# Altium PCB leds.PcbDoc
Units mm, origin at the board's own origin, x right, y up, seen from the top; angles counter-clockwise.
Board outline 36 x 36 mm, 2 copper layers (Top Layer, Bottom Layer); 21 components, 11 nets, 44 pads, 2 vias.
Unrouted connection lines stored in the file: 1.
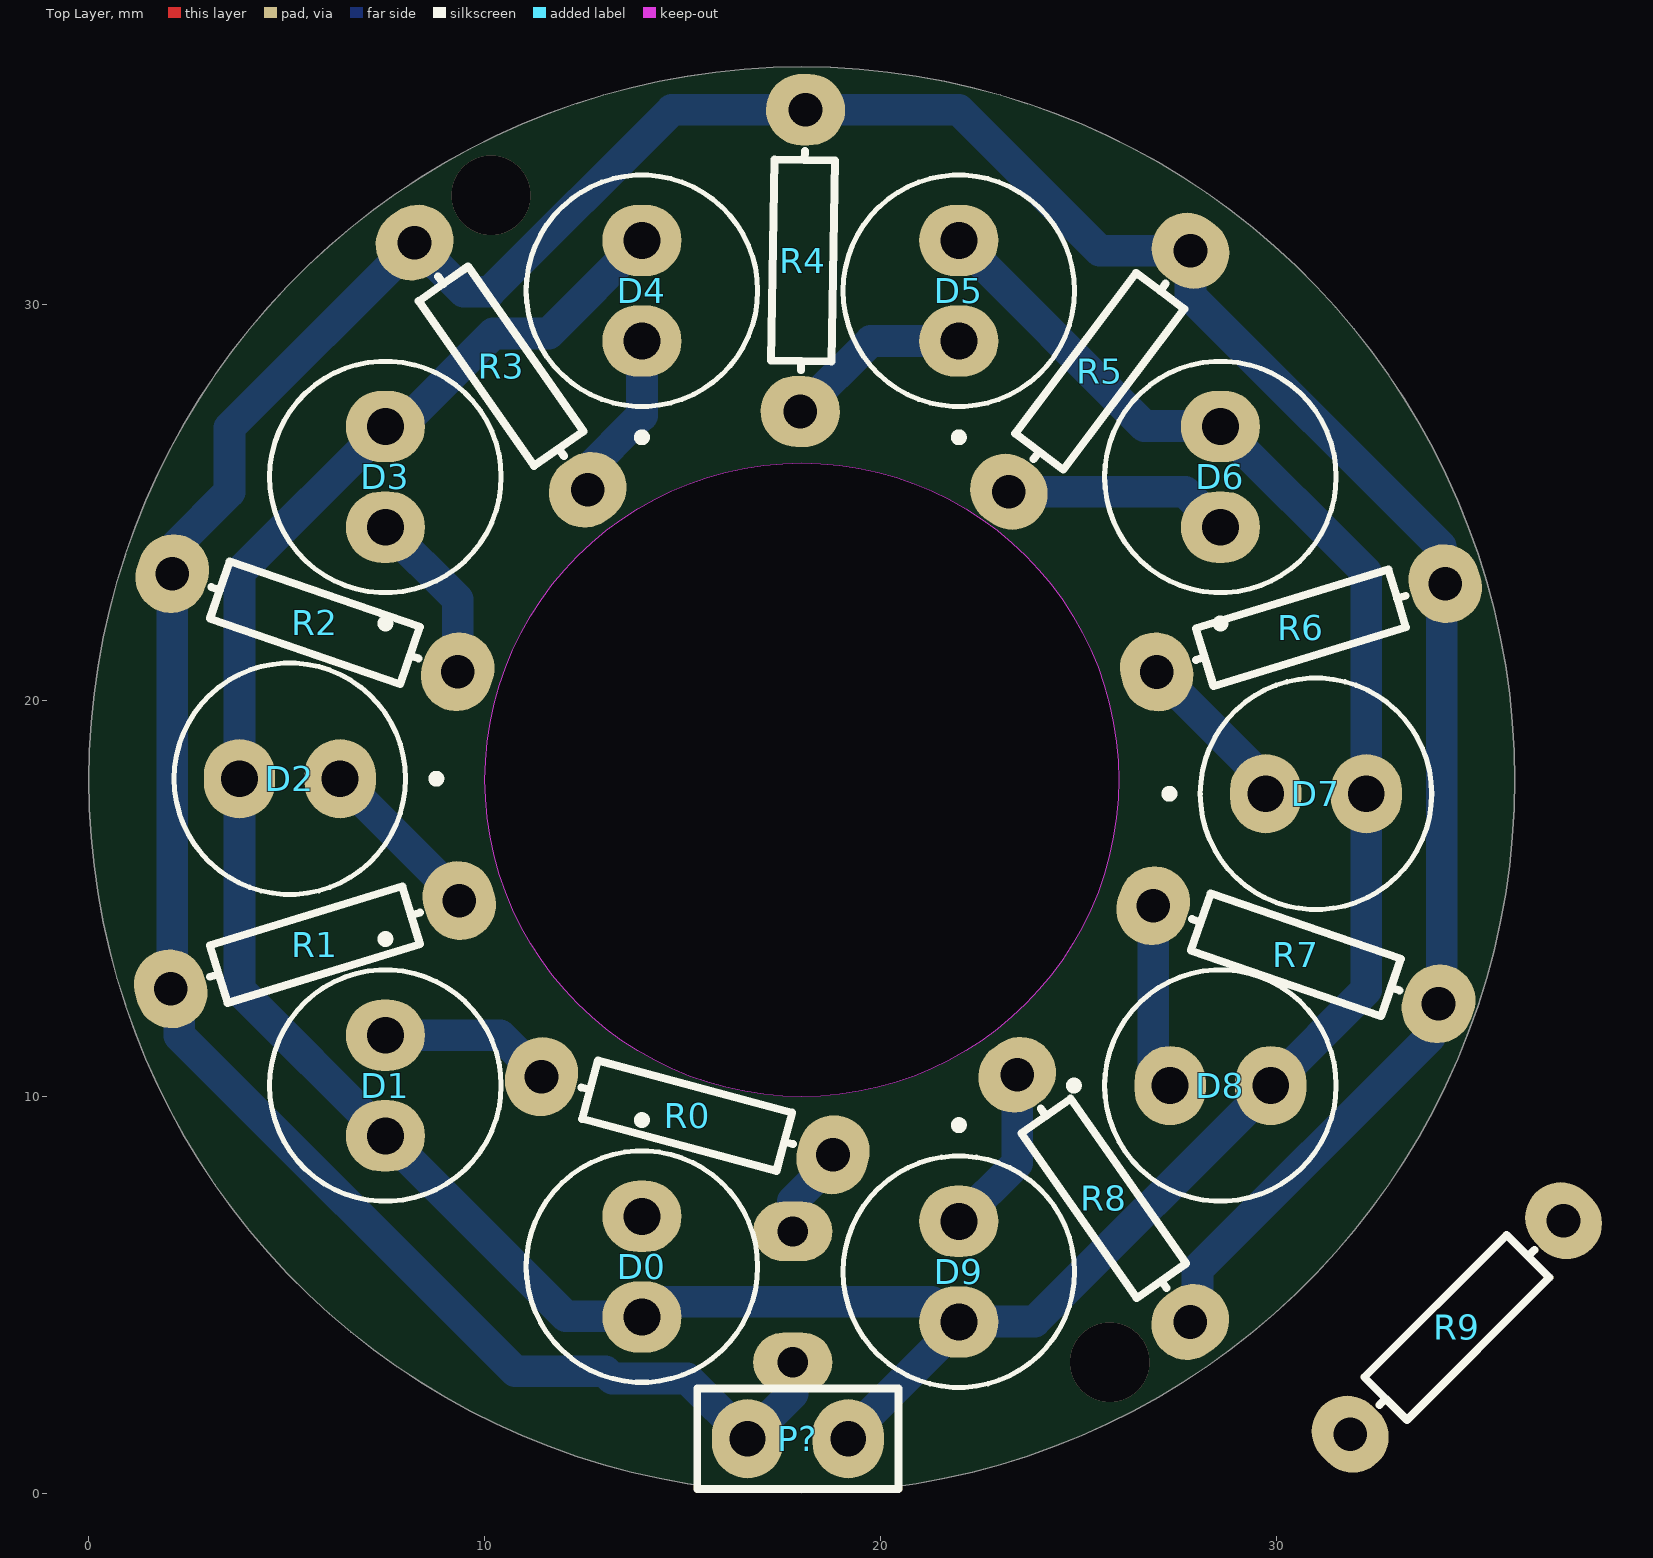
[diagram p0: Top Layer view]
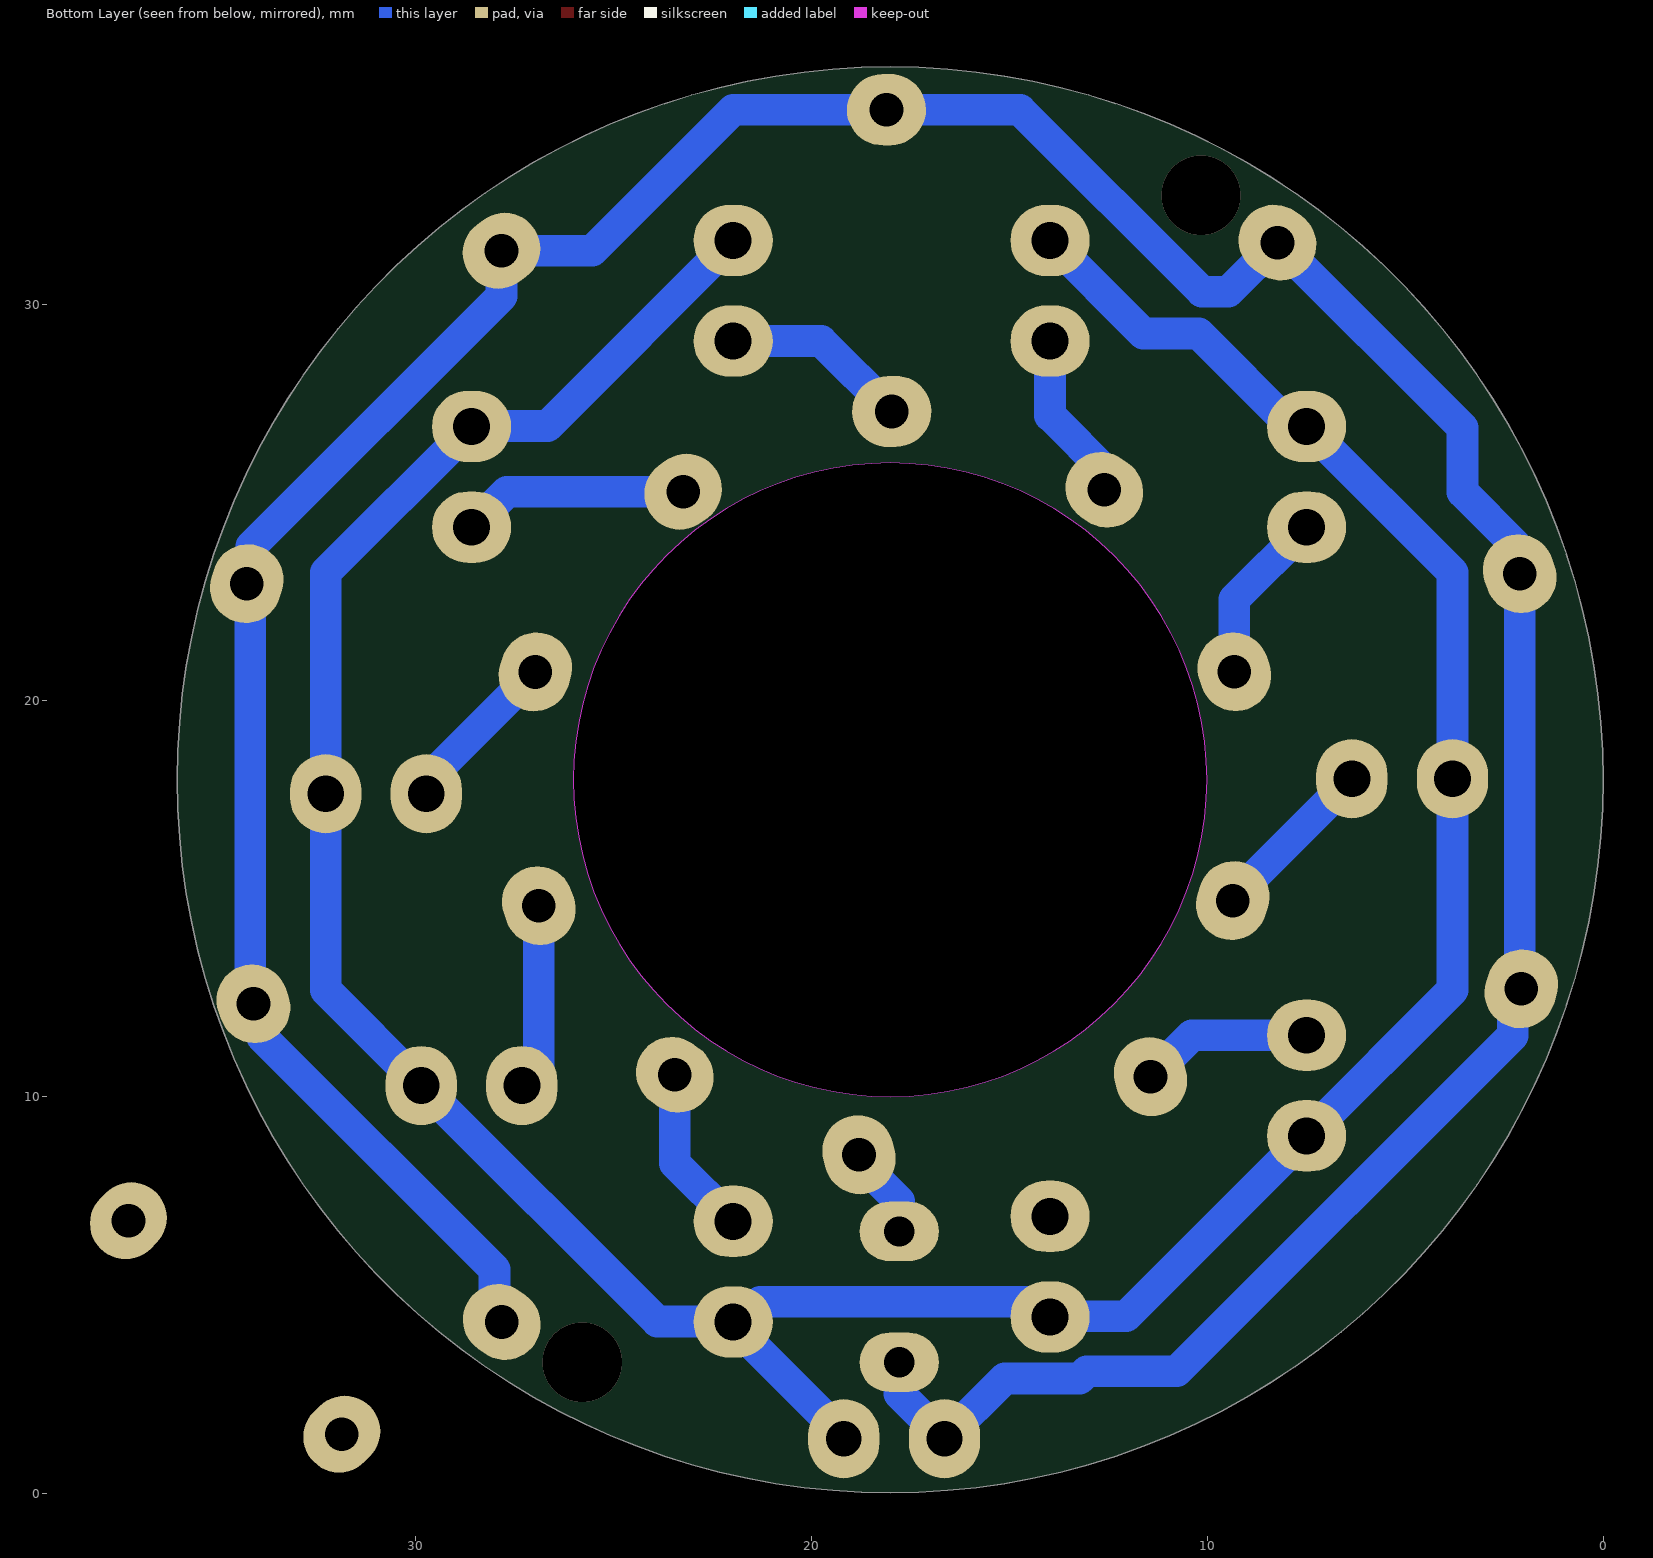
[diagram p1: Bottom Layer view, seen from below]

## Layer stack, top to bottom
Top Solder: solder mask 0.0102, Solder Resist, Dk 3.5
Top Layer: signal copper 0.0356
Dielectric 1: dielectric 0.32, FR-4, Dk 4.8
Bottom Layer: signal copper 0.0356
Bottom Solder: solder mask 0.0102, Solder Resist, Dk 3.5

## Board outline
18.006,0.006 cw(c18.006,18.006) 0.006,18.006 cw(c18.006,18.006) 18.006,36.006 cw(c18.006,18.006) 36.006,18.006 cw(c18.006,18.006)
cut-out: 18.006,10.006 cw(c18.006,18.006) 10.006,18.006 cw(c18.006,18.006) 18.006,26.006 cw(c18.006,18.006) 26.006,18.006 cw(c18.006,18.006)

## Design rules (kind name [scope] priority, off if disabled: settings)
Clearance [All] p1: gap=0.254 ignorepadtopadclearanceinfootprint=FALSE except(0: Arc-Hole Track-Hole SMDPad-Hole THPad-Hole Via-Hole Fill-Hole Poly-Hole Region-Hole Text-Hole)
PolygonConnect [All] p1: connectstyle=Relief reliefconductorwidth=0.254 reliefentries=4 polygonreliefangle="90 Angle" airgapwidth=0.254
RoutingLayers [All] p1: top layer_v5=FALSE bottom layer_v5=TRUE
RoutingVias [All] p1: holewidth=0.711 width=1.27 viastyle="Through Hole" minholewidth=0.711 minwidth=1.27 maxholewidth=0.711 maxwidth=1.27
SolderMaskExpansion [All] p1: expansion=0.102 istentingtop=FALSE
Width [All] p1: maxlimit=1.2 minlimit=0.8 preferedwidth=1
29 further rules are at their usual default settings.

## Components (designator, comment, footprint, x,y, rotation, side; value= is the part's Value field where it differs from the comment)
D0 "HLMP-4719-A00B2" LEDRD254W47D584H1078 13.97,5.715 r270 top
D1 "HLMP-4719-A00B2" LEDRD254W47D584H1078 7.493,10.287 r270 top
D2 "HLMP-4719-A00B2" LEDRD254W47D584H1078 5.08,18.034 r180 top
D3 "HLMP-4719-A00B2" LEDRD254W47D584H1078 7.493,25.654 r90 top
D4 "HLMP-4719-A00B2" LEDRD254W47D584H1078 13.97,30.353 r90 top
D5 "HLMP-4719-A00B2" LEDRD254W47D584H1078 21.971,30.353 r90 top
D6 "HLMP-4719-A00B2" LEDRD254W47D584H1078 28.575,25.654 r90 top
D7 "HLMP-4719-A00B2" LEDRD254W47D584H1078 30.988,17.653 r0 top
D8 "HLMP-4719-A00B2" LEDRD254W47D584H1078 28.575,10.287 r0 top
D9 "HLMP-4719-A00B2" LEDRD254W47D584H1078 21.971,5.588 r270 top
P? "Header 2" HDR1X2 16.637,1.37 r0 top
R0 "Res1" AXIAL-0.3 15.113,9.525 r345 top value=1K
R1 "Res1" AXIAL-0.3 5.715,13.843 r197 top value=1K
R2 "Res1" AXIAL-0.3 5.715,21.971 r161 top value=1K
R3 "Res1" AXIAL-0.3 10.414,28.448 r125 top value=1K
R4 "Res1" AXIAL-0.3 18.034,31.115 r89 top value=1K
R5 "Res1" AXIAL-0.3 25.527,28.321 r53 top value=1K
R6 "Res1" AXIAL-0.3 30.607,21.844 r17 top value=1K
R7 "Res1" AXIAL-0.3 30.48,13.589 r341 top value=1K
R8 "Res1" AXIAL-0.3 25.628,7.439 r305 top value=1K
R9 "Res1" AXIAL-0.3 34.544,4.181 r45 top value=1K (schematic designator R0)

## Footprints (in the part's own frame and the unit in brackets; to place one, negate y for a bottom-side part, rotate by r counter-clockwise, add the part's x,y. Pads: shape width x height; smd on the part's side, far side on the other; paste and mask are expansions set on the pad)
AXIAL-0.3 [mm] "Axial Device, Thru-Hole; 2 Leads; 0.3 in Pin Spacing"
  oval 1.8x2 hole 0.85: 1(-3.81,0) 2(3.81,0)
  silkscreen extent -2.77,-0.76 2.77,0.76
HDR1X2 [mm] "Connector; Header; 2 Position"
  oval 1.8x2 hole 0.9: 1(0,0) 2(2.54,0)
  silkscreen extent -1.27,-1.27 3.81,1.27
LEDRD254W47D584H1078 [mm]
  oval 1.8x2 hole 0.93: 1(-1.27,0) 2(1.27,0)
  silkscreen extent -3.8,-2.92 2.92,2.92

## Part data
D0 D1 D2 D3 D4 D5 D6 D7 D8 D9: "Yellow 5mm LED LOW CURRENT 2mA R/A T/L", Package=None, Check_prices=https://www.snapeda.com/parts/HLMP-4719-A00B2/Avago/view-part/?ref=eda, MF=Avago, MP=HLMP-4719-A00B2, SnapEDA_Link=https://www.snapeda.com/parts/HLMP-4719-A00B2/Avago/view-part/?ref=snap
P?: "Header, 2-Pin", LatestRevisionDate=17-Jul-2002, LatestRevisionNote="Re-released for DXP Platform.", Publisher="Altium Limited"
R0 R1 R2 R3 R4 R5 R6 R7 R8 R9: "Resistor", LatestRevisionDate=17-Jul-2002, LatestRevisionNote="Re-released for DXP Platform.", PackageDescription="Axial Device, Thru-Hole; 2 Leads; 0.3 in Pin Spacing", PackageReference=AXIAL-0.3, Published=8-Jun-2000, Publisher="Altium Limited"

## Free pads (board coordinates)
  oval 2x1.5 hole 0.762: 2(17.78,6.604) 3(17.78,3.302)

## Via types
v1: diameter 2, hole 2, Top Layer to Bottom Layer, 2 vias

## Nets (pads, with @x,y where several pads share a name; then routed paths per layer and width w, separated by ;. In a path a pad name is that pad's centre, name@x,y a point inside that pad or via, vN(x,y) a via of type N, cw(c..) or ccw(c..) an arc to the next point about the centre after c; other vN are vias at no path point)
GND: P?.1 pad.2 pad.3 R0.2 R1.2 R2.2 R3.2 R4.2 R5.2 R6.2 R7.2 R8.2 | length 101.9
  Bottom Layer w0.8: R1.2 2.292,12.508 2.292,11.551 10.771,3.072 13.045,3.072 13.226,2.891 15.116,2.891 P?.1 17.78,2.513 pad.3 ; R1.2@2.113,12.688 R2.2 2.227,23.326 2.227,23.944 3.556,25.273 3.556,26.896 R3.2 9.471,30.327 10.134,30.327 14.731,34.924 R4.2 21.972,34.924 25.532,31.364 R5.2 27.82,30.219 34.136,23.903 34.136,23.073 R6.2 34.166,22.874 34.166,12.433 33.859,12.125 33.859,11.507 27.996,5.644 27.996,4.501 R8.2 ; pad.2 17.78,7.363 18.793,8.377 R0.2
NetD1_1: D1.1 R0.1 | length 4.4
  Bottom Layer w0.8: D1.1 10.387,11.557 R0.1
NetD2_1: D2.1 R1.1 | length 4.3
  Bottom Layer w0.8: D2.1 9.359,15.025 R1.1
NetD3_1: D3.1 R2.1 | length 4.4
  Bottom Layer w0.8: D3.1 9.317,22.56 R2.1
NetD4_1: D4.1 R3.1 | length 4
  Bottom Layer w0.8: R3.1@12.472,25.708 13.97,27.206 D4.1
NetD5_1: D5.1 R4.1 | length 4.7
  Bottom Layer w0.8: R4.1 19.745,29.083 D5.1
NetD6_1: D6.1 R5.1 | length 5.7
  Bottom Layer w0.8: R5.1 27.681,25.278 D6.1
NetD7_1: D7.1 R6.1 | length 3.8
  Bottom Layer w0.8: R6.1 29.399,18.295 D7.1@29.399,17.972
NetD8_1: D8.1 R7.1 | length 4.7
  Bottom Layer w0.8: R7.1 26.878,10.714 D8.1
NetD9_1: D9.1 R8.1 | length 4.3
  Bottom Layer w0.8: D9.1 23.442,8.329 R8.1
VCC: D0.2 D1.2 D2.2 D3.2 D4.2 D5.2 D6.2 D7.2 D8.2 D9.2 P?.2 | length 88.3
  Bottom Layer w0.8: D4.2 11.62,29.273 10.213,29.273 7.864,26.924 D3.2 3.81,23.241 D2.2 3.81,12.7 D1.2 12.051,4.459 13.956,4.459 D0.2 14.143,4.445 14.524,4.826 21.29,4.826 21.798,4.318 D9.2 21.971,4.241 19.177,1.447 P?.2 ; D5.2 26.656,26.938 28.561,26.938 D6.2 32.258,23.241 D7.2 32.258,12.7 D8.2 23.89,4.332 D9.2@21.985,4.332
pads on no net: D0.1 R9.1 R9.2
copper on no net:
  other v1: 25.781,3.302 10.16,32.766

## Silkscreen, mask and mechanical layers (free items; w line width, h text height)
Mechanical 1:
  circle w0.013: c18.006,18.006 r8
  circle w0.013: c18.006,18.006 r18